# Altium PCB firing_angle_control.PcbDoc
Units mm, origin at the board's own origin, x right, y up, seen from the top; angles counter-clockwise.
Board outline 70 x 70 mm, 2 copper layers (Top Layer, Bottom Layer); 25 components, 19 nets, 82 pads, 4 vias.
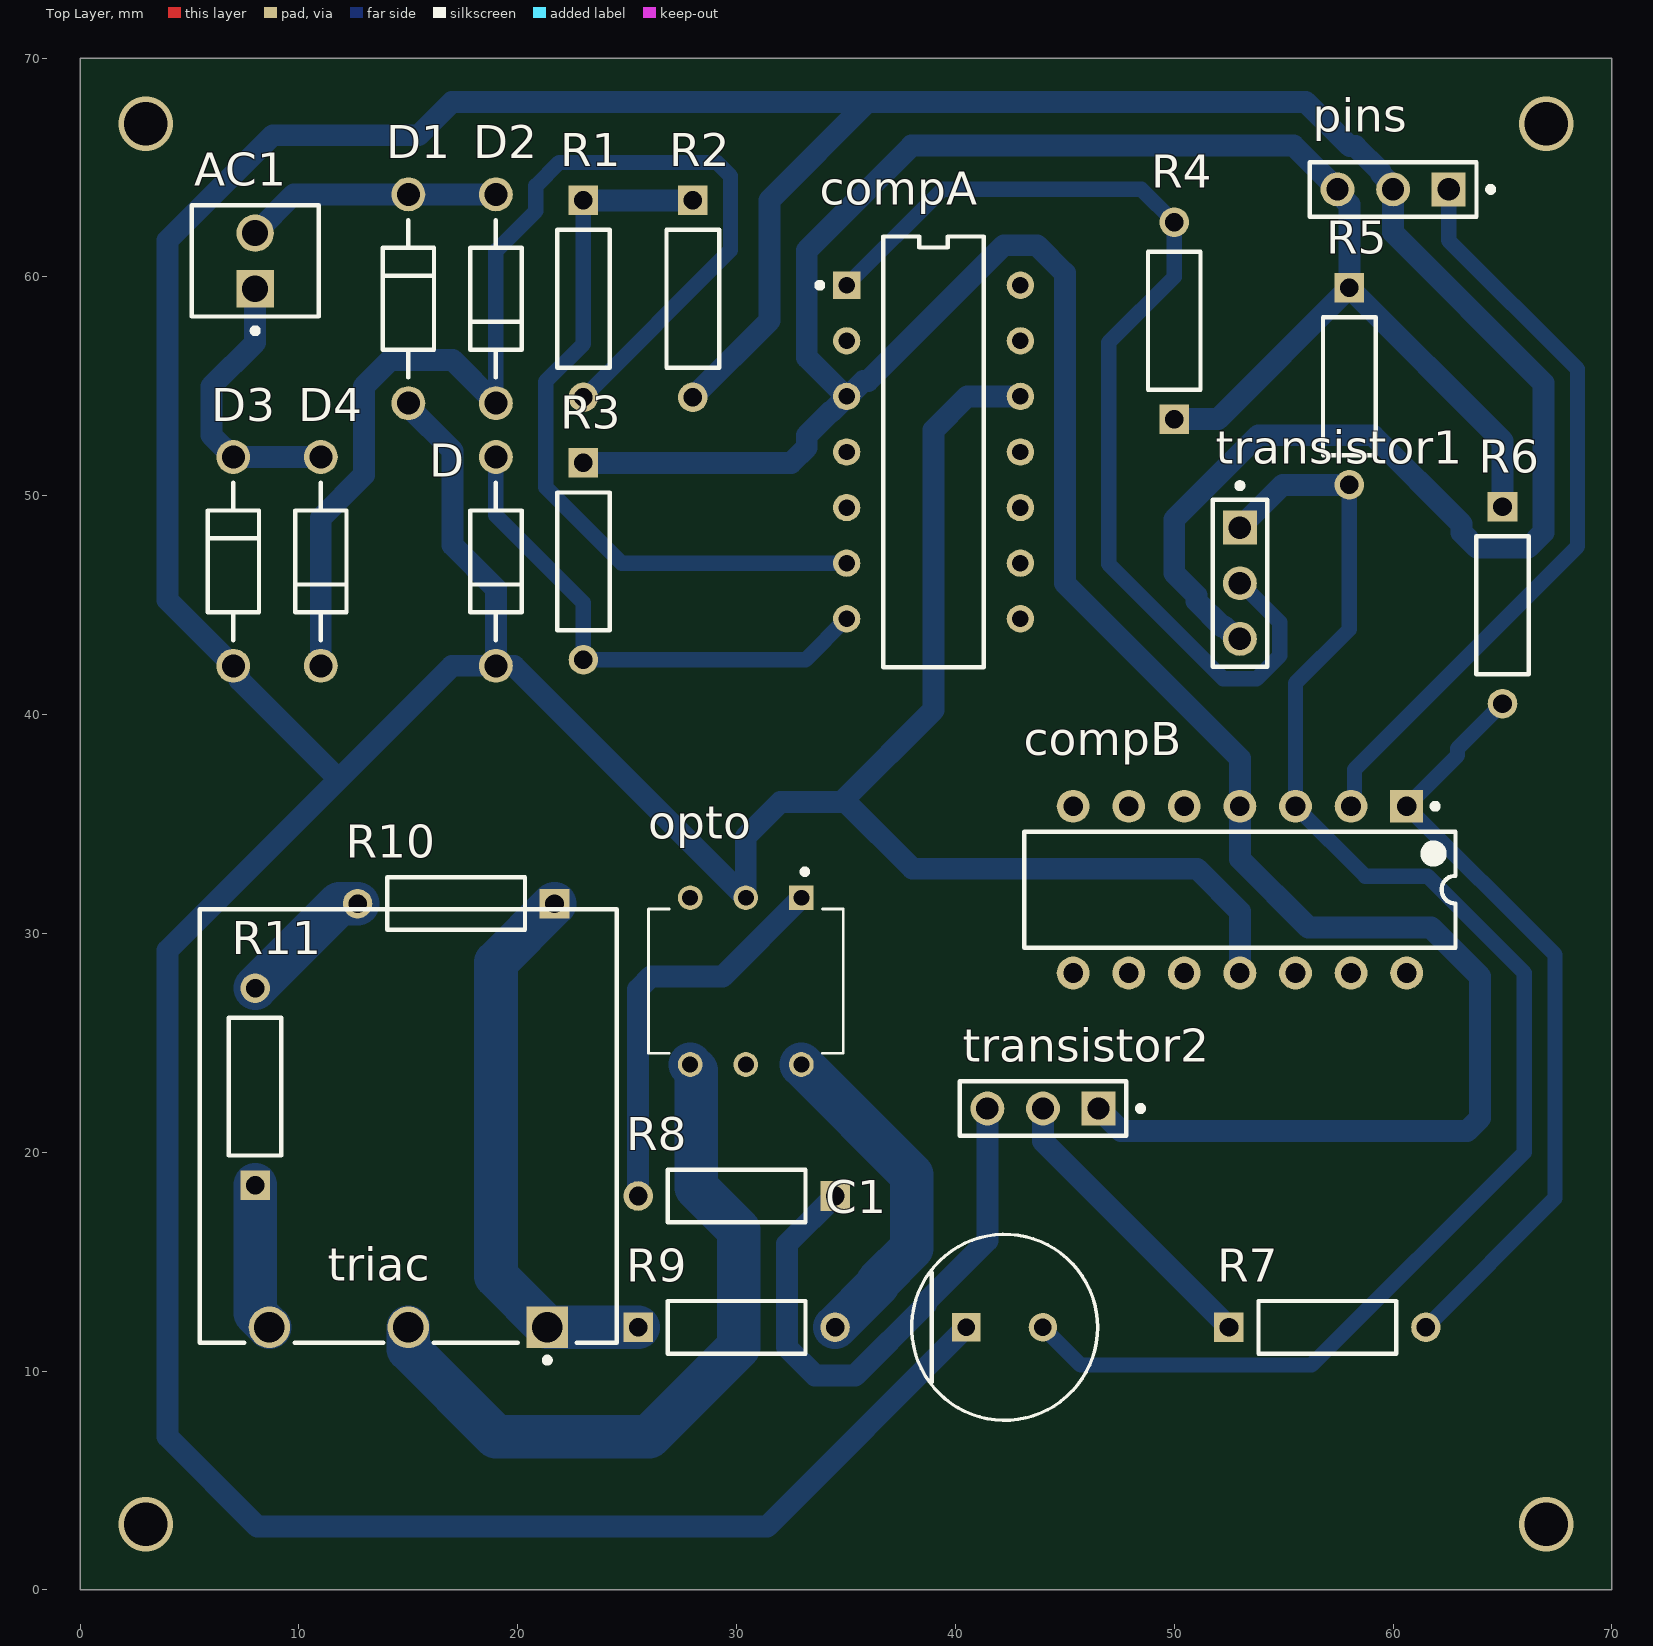
[diagram p0: Top Layer view]
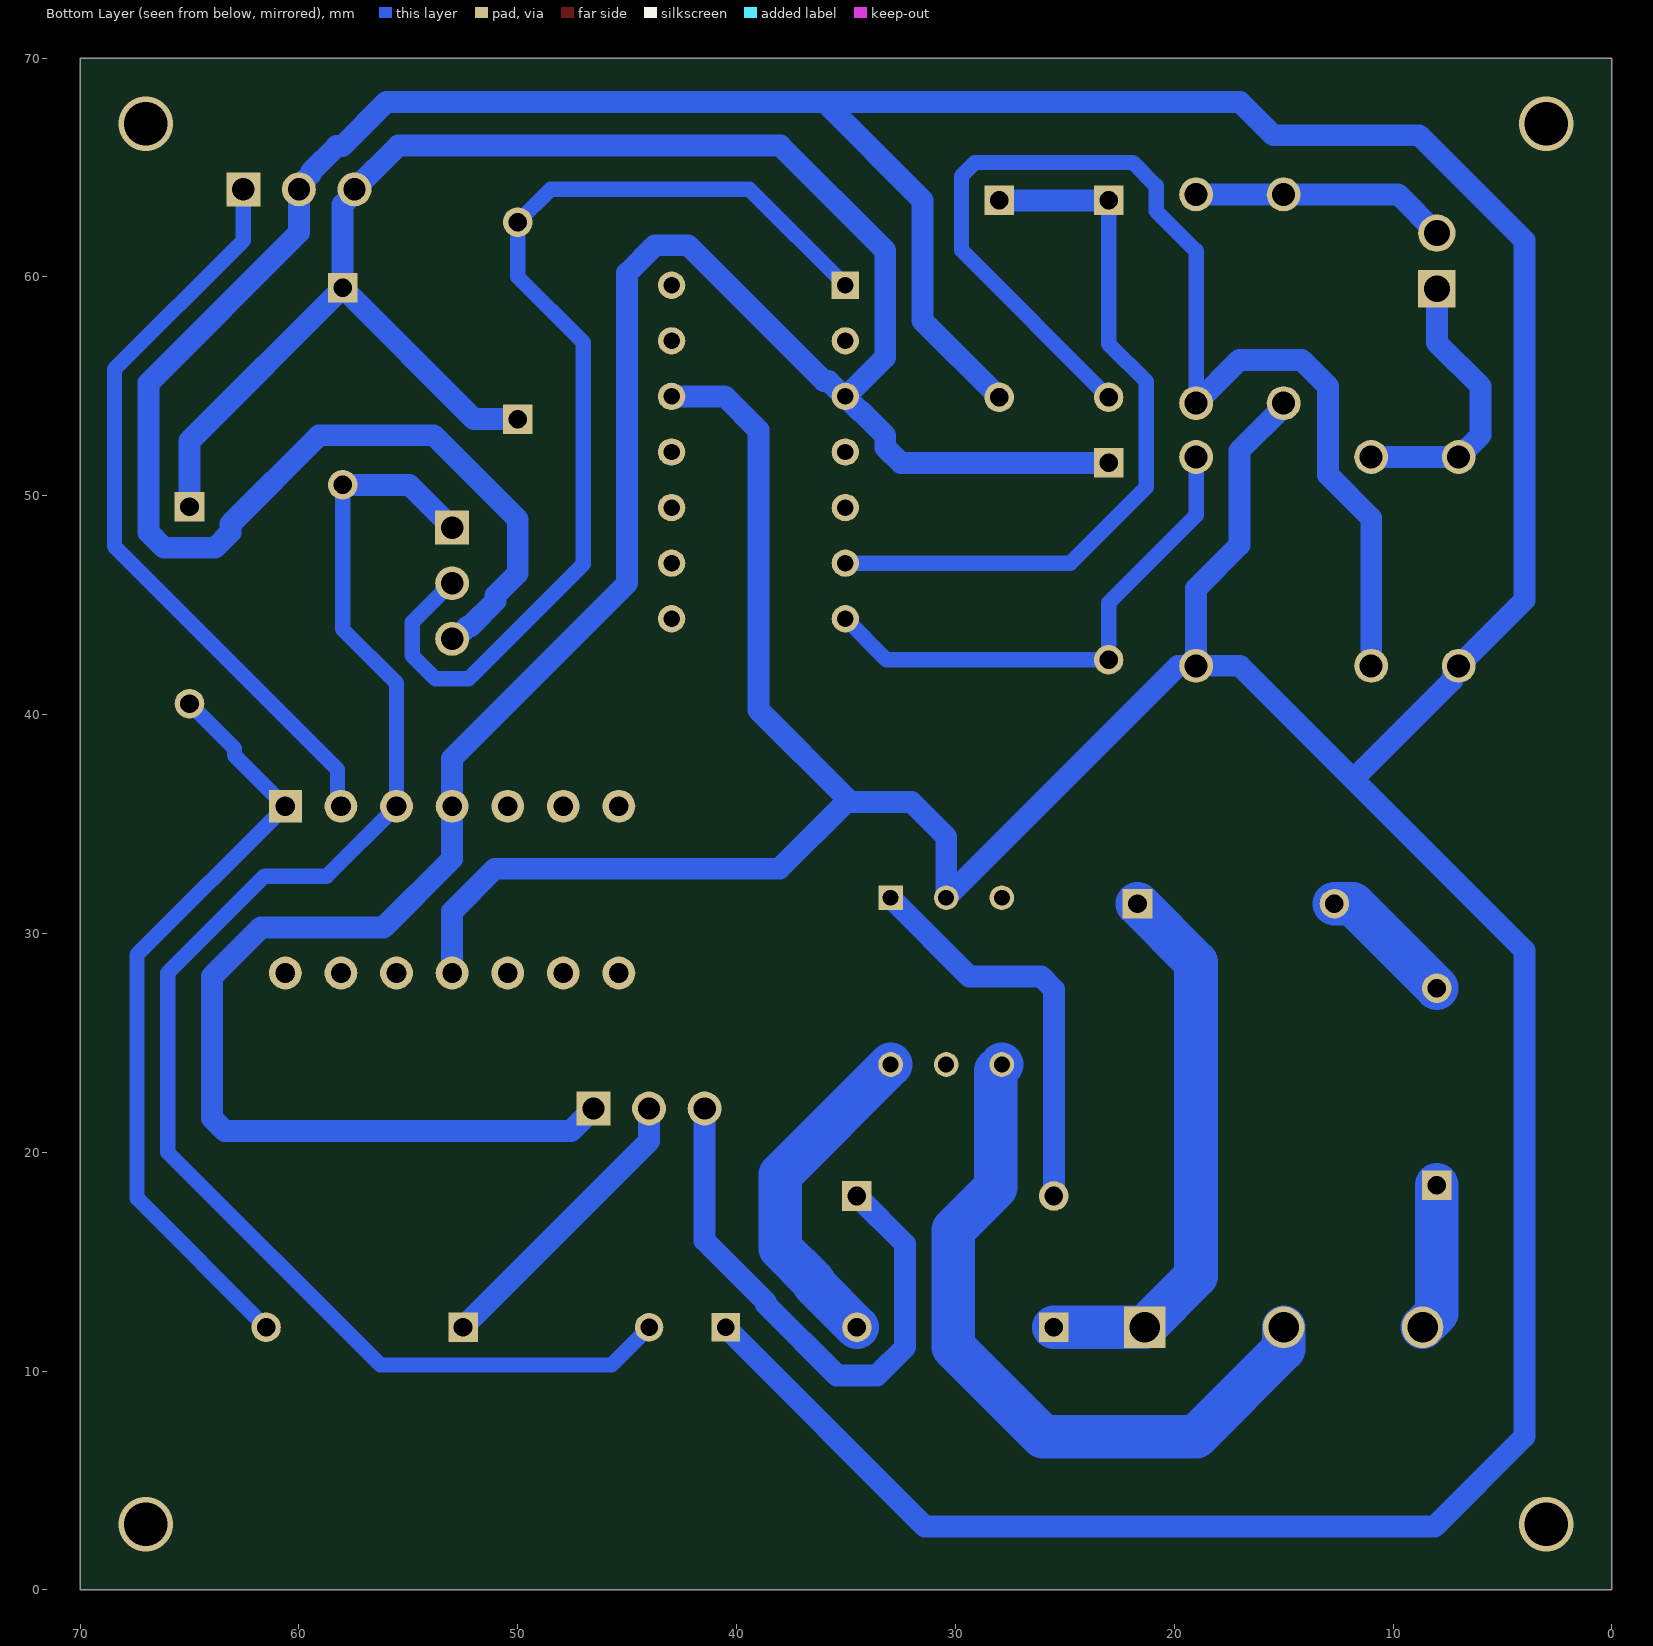
[diagram p1: Bottom Layer view, seen from below]

## Layer stack, top to bottom
Top Solder: solder mask 0.0102, Solder Resist, Dk 3.5
Top Layer: signal copper 0.0356
Dielectric 1: dielectric 0.32, FR-4, Dk 4.8
Bottom Layer: signal copper 0.0356
Bottom Solder: solder mask 0.0102, Solder Resist, Dk 3.5

## Board outline
0,0 70,0 70,70 0,70

## Design rules (kind name [scope] priority, off if disabled: settings)
Clearance [All] p1: gap=0.7 ignorepadtopadclearanceinfootprint=FALSE
PolygonConnect [All] p1: connectstyle=Relief reliefconductorwidth=0.254 reliefentries=4 polygonreliefangle="90 Angle" airgapwidth=0.254
RoutingLayers [All] p1: top layer_v5=FALSE bottom layer_v5=TRUE
RoutingVias [All] p1: holewidth=0.75 width=1 viastyle="Through Hole" minholewidth=0.75 minwidth=1 maxholewidth=0.75 maxwidth=1
SolderMaskExpansion [All] p1: expansion=0.102 istentingtop=FALSE
Width [All] p1: maxlimit=2 minlimit=0.7 preferedwidth=1
29 further rules are at their usual default settings.

## Components (designator, comment, footprint, x,y, rotation, side; value= is the part's Value field where it differs from the comment)
AC1 "22-27-2021" MOLX-22-27-2021_V 8,60.73 r90 top
C1 "EEUHD1E221" FP-RAD-TH-D_8_0_5-L_11_5-MFG 42.25,12 r0 top
compA "LM339N" FP-N0014A-MFG 39,52 r0 top
compB "LM324N" N0014A 53,32 r270 top
D "1N4007" ONSC-AXIAL_LEAD-2-59-10_P 19,47 r90 top
D1 "1N4007" ONSC-AXIAL_LEAD-2-59-10_P 15,59 r270 top
D2 "1N4007" ONSC-AXIAL_LEAD-2-59-10_P 19,59 r90 top
D3 "1N4007" ONSC-AXIAL_LEAD-2-59-10_P 7,47 r270 top
D4 "1N4007" ONSC-AXIAL_LEAD-2-59-10_P 11,47 r90 top
opto "MOC3021" DIP762W45P254L889H508Q6 30.42,27.82 r270 top
pins "22-28-4033" MOLX-22-28-4033_V 60,64 r180 top
R1 "330" RESA60-630X240 23,59 r270 top
R2 "1k" RESA60-630X240 28,59 r270 top
R3 "1k" RESA60-630X240 23,47 r270 top
R4 "1k" RESA60-630X240 50,58 r90 top
R5 "3k" RESA60-630X240 58,55 r270 top
R6 "1k" RESA60-630X240 65,45 r270 top
R7 "1k" RESA60-630X240 57,12 r0 top
R8 "1k" RESA60-630X240 30,18 r180 top
R9 "1k" RESA60-630X240 30,12 r0 top
R10 "10k" RESA60-630X240 17.18,31.36 r180 top
R11 "10k" RESA60-630X240 8,23 r90 top
transistor1 "22-28-4033" MOLX-22-28-4033_V 53,46 r270 top
transistor2 "22-28-4033" MOLX-22-28-4033_V 44,22 r180 top
triac "3852A-282-103AL" BOUR-3852A-282-103AL-3_V 15,12 r180 top

## Footprints (in the part's own frame and the unit in brackets; to place one, negate y for a bottom-side part, rotate by r counter-clockwise, add the part's x,y. Pads: shape width x height; smd on the part's side, far side on the other; paste and mask are expansions set on the pad)
BOUR-3852A-282-103AL-3_V [mm] "TH, 3-Leads, Body 19.81x19.05mm, Pitch 6.35mm"
  rect 1.9x1.9 hole 1.4: 1(-6.35,0)
  round 1.9 hole 1.4: 2(0,0) 3(6.35,0)
  silkscreen extent -9.53,-19.11 9.53,1.62, body extent -9.52,-19.11 9.52,0.7, height 19.05
DIP762W45P254L889H508Q6 [mm]
  rect 1.13x1.13 hole 0.73: 1(-3.81,2.54)
  round 1.13 hole 0.73: 2(-3.81,0) 3(-3.81,-2.54) 4(3.81,-2.54) 5(3.81,0) 6(3.81,2.54)
  silkscreen extent -5.12,-4.45 3.3,4.45
FP-N0014A-MFG [mm]
  rect 1.25x1.25 hole 0.75 paste-1000 mask+0: 1(-3.97,7.62)
  round 1.25 hole 0.75 paste-1000 mask+0: 2(-3.97,5.08) 3(-3.97,2.54) 4(-3.97,0) 5(-3.97,-2.54) 6(-3.97,-5.08) 7(-3.97,-7.62) 8(3.97,-7.62) 9(3.97,-5.08) 10(3.97,-2.54) 11(3.97,0) 12(3.97,2.54) 13(3.97,5.08) 14(3.97,7.62)
  silkscreen extent -5.32,-9.85 2.3,9.84, body extent -4.69,-9.94 4.69,9.94, height 0.25
FP-RAD-TH-D_8_0_5-L_11_5-MFG [mm]
  rect 1.3x1.3 hole 0.8 paste-1000 mask+0: 1(-1.75,0)
  round 1.3 hole 0.8 paste-1000 mask+0: 2(1.75,0)
  silkscreen extent -4.25,-4.25 4.25,4.25, body extent -4.35,-4.35 4.35,4.35, height 0.25
MOLX-22-27-2021_V [mm] "Header, 2-Leads, Body 5.8x5.08mm"
  rect 1.7x1.7 hole 1.19: 1(-1.27,0)
  round 1.7 hole 1.19: 2(1.27,0)
  silkscreen extent -3.31,-2.9 2.54,2.9, body extent -2.54,-2.9 2.54,2.9, height 11.72
MOLX-22-28-4033_V [mm] "THD, 3-Leads, Body 7.62x2.49mm, Pitch 2.54mm"
  rect 1.55x1.55 hole 1.02: 1(-2.54,0)
  round 1.55 hole 1.02: 2(0,0) 3(2.54,0)
  silkscreen extent -4.59,-1.25 3.81,1.24, body extent -3.81,-1.24 3.81,1.24, height 8.38
N0014A [mm] "DIP, 14-Leads, Body 19.7x6.6mm, Pitch 2.54mm"
  rect 1.5x1.5 hole 0.9: 1(-3.81,7.62)
  round 1.5 hole 0.9: 2(-3.81,5.08) 3(-3.81,2.54) 4(-3.81,0) 5(-3.81,-2.54) 6(-3.81,-5.08) 7(-3.81,-7.62) 8(3.81,-7.62) 9(3.81,-5.08) 10(3.81,-2.54) 11(3.81,0) 12(3.81,2.54) 13(3.81,5.08) 14(3.81,7.62)
  silkscreen extent -3.93,-9.85 2.65,9.85, body extent -3.95,-9.85 3.95,9.85, height 5.08
ONSC-AXIAL_LEAD-2-59-10_P [mm] "AXIAL, 2-Leads, Diameter 2.35mm"
  round 1.55 hole 1.05: 1(-4.77,0) 2(4.77,0)
  silkscreen extent -3.6,-1.18 3.6,1.17
RESA60-630X240 [mm] "Axial Resistor, 2-Leads, Dia 2.4mm, Body Length 6.3mm"
  rect 1.35x1.35 hole 0.85: 1(-4.5,0)
  round 1.35 hole 0.85: 2(4.5,0)
  silkscreen extent -3.15,-1.2 3.15,1.2, body extent -3.15,-1.2 3.15,1.2, height 2.4

## Part data
AC1: library part CMP-2000-05537-1, "Male Header, Pitch 2.54 mm, 1 x 2 Position, Height 11.7 mm, Tail Length 3.56 mm, 0 to 75 degC, RoHS, Bulk", Current - Max=4A, Manufacturer=Molex, Operating temperature=0°Cto+75°C, Package Description="2-Leads Header, Body 5.08 x 5.8 mm, Pitch 2.54 mm", Package Version="Rev. BC, 02/2012", PartNumber=0022272021, Voltage - Max=250V, Contact Material=Tinplatedbrass, Current Rating=4A, Datasheet URL=http://www.molex.com/pdm_docs/sd/022272021_sd.pdf, Datasheet Version="Rev. F, 06/2009", Housing Material=Nylon(UL94V-0), Manufacturer URL=http://www.molex.com/, Mounting Technology=ThroughHole, No. of Positions=2, No. of Rows=1, Orientation=Vertical, Package Reference=22-27-2021, Pitch=2.54mm, Voltage Rating=250V
C1: library part CMP-05427-001200-1, "Aluminum Electrolytic Capacitors (Radial Lead Type) AEC-Q200 Qualified 220uF ±20% 25V", Capacitance=220uF, Case/Package=Radial, Max Operating Temperature=105°C, Min Operating Temperature=-55°C, Package Quantity=200, Ripple Current=230mA, Tolerance=20%, Voltage=25V, Construction=RADIAL, Contact Plating=Tin, Diameter=8mm, Height=11.5mm, Height - Seated (Max)=0.512inch, Lead Diameter=0.6mm, Lead Pitch=3.5mm, Lead/Base Style=Straight, Length=11.5mm, Life (Hours)=1000Hour, Mount="Through Hole", Number of Pins=2, Packaging=Bulk, Polarity=Polar, REACH SVHC="No SVHC", Ripple Current (AC)=230mA, RoHS Compliant=Yes, Series=HD, Termination=Radial, Voltage Rating=25V, Voltage Rating (DC)=25V
compA: library part CMP-0055-00143-4, "IC QUAD DIFF COMPARATOR 14-DIP", Case/Package=PDIP, Dual Supply Voltage=9V, Input Bias Current=250nA, Input Offset Voltage (Vos)=5mV, Max Dual Supply Voltage=15V, Max Operating Temperature=70°C, Max Power Dissipation=1.05W, Max Supply Current=500uA, Max Supply Voltage=30V, Min Dual Supply Voltage=1V, Min Operating Temperature=0°C, Min Supply Voltage=2V, Nominal Supply Current=2mA, Output Current=20mA, Output Current per Channel=6mA, Package Quantity=25, Power Dissipation=1.05kW, Quiescent Current=2.5mA, Voltage Gain=106.02dB, Contact Plating=Gold, Height=4.57mm, Lead Free="Lead Free", Length=19.3mm, Max Input Current=250nA, Mount="Through Hole", Number of Channels=4, Number of Elements=4, Number of Pins=14, Output Type=TTL, Packaging=Rail/Tube, Radiation Hardening=No, REACH SVHC="No SVHC", Response Time=1.3us, Weight=0.032734oz, Width=6.35mm
compB: library part CMP-0055-00082-3, "Low Power Quad Operational Amplifier, 14-pin MDIP", Manufacturer="Texas Instruments", Package Reference=N0014A, PackageTopMarking=NSUZXYYTTE#*LM324N, PowerWise=N, Code_JEDEC=MS-001-AA, ComponentLink1Description="Datasheet URL", ComponentLink1URL=http://www.ti.com/general/docs/lit/getliterature.tsp?genericPartNumber=LM324&fileType=pdf, CompType=Amplifiers, PackageDescription="MDIP, .750 x .250 x.130in, 14 Lead, .100in Pitch", PinCount=14, RoHS=N
D D1 D2 D3 D4: library part CMP-0902-00142-1, "Standard Recovery Rectifier, 2-Pin Axial_Lead, Pb-Free, Bulk Bag", Manufacturer="On Semiconductor", ComponentLink1Description="Manufacturer URL", ComponentLink1URL=http://www.onsemi.com/, ComponentLink2Description=Datasheet, ComponentLink2URL=http://www.onsemi.com/pub_link/Collateral/1N4001-D.PDF, ComponentLink3Description="Package Specification", ComponentLink3URL=http://www.onsemi.cn/pub_link/Collateral/59-10.PDF, DatasheetVersion="Rev. 13", IFSM Max (A)=30, IO(rec) Max (A)=1, Mounting Technology="Through Hole", PackageDescription="2-Pin, Axial Lead, Diameter 2.35 mm", PackageReference=AXIAL_LEAD-2-59-10, PackageVersion="Rev. U, 02/2005", Packing="Bulk Bag", PartNumber=1N4007, RoHS=TRUE, Type="Standard Recovery", VRRM Max (V)=1000
opto: "Optoisolator Triac Output 5000Vrms 1 Channel 6-DIP", Package="DIP-6 Lite-On", Availability=Unavailable, MF=Lite-On, MP=MOC3021, Price=None, SnapEDA_Link=https://www.snapeda.com/parts/MOC3021/Lite-On/view-part/4551083/?ref=snap
pins transistor1 transistor2: library part CMP-1676-00001-5, "Male Header, Pitch 2.54 mm, 1 x 3 Position, Height 8.38 mm, Tail Length 3.18 mm, RoHS, Bulk", Colour=Black, Current Rating="4 A", Manufacturer=Molex, Max Operating Temperature="75 degC", Min Operating Temperature="0 degC", Package Quantity=1, Voltage Rating="250 V", ComponentLink1Description="Manufacturer URL", ComponentLink1URL=http://www.molex.com/, ComponentLink2Description=Datasheet, ComponentLink2URL=http://www.molex.com/pdm_docs/sd/022284033_sd.pdf, Contact Finish=Gold, Contact Material=Brass, Contact Plating=Gold, DatasheetVersion="Rev. G, 01/2012", Height="8.38 mm", Lead Pitch="0.1 inch", Length="7.62 mm", Mount="Through Hole", Mounting Technology="Through Hole", PackageDescription="Male Header, Pitch 2.54 mm, 1 x 3 Position, Height 8.38 mm, Tail Length 3.18 mm", PackageReference=22-28-4033, Packaging=Bulk, Pins=3, REACH SVHC=Unknown, RoHSCompliant=true, Rows=1
R1 R2 R3 R4 R5 R6 R7 R8 R9 R10 R11: library part CMP-1659-00075-1, "Axial Resistor, 1 KOhm, +/- 1%, 250 mW, -55 to 155 degC, 2-Pin THD, RoHS, Bulk", Case\Package=Axial, Max Operating Temperature="155 degC", Min Operating Temperature="-55 degC", Package Quantity=200, Power Rating="250 mW", Resistance="10 kohm", Tolerance=1%, Voltage Rating="250 V", ComponentLink1Description="Manufacturer URL", ComponentLink1URL=http://www.yageo.com/, ComponentLink2Description=Datasheet, ComponentLink2URL=http://www.yageo.com/documents/recent/Yageo%20LR_MFR_2013.pdf, DatasheetVersion=Apr-13, Length="0.248 inch", PackageDescription="2-Pin Axial Lead, Dia 2.4 mm, Body Length 6.3 mm", PackageReference=MFR-25, Packaging=Bulk, RoHSCompliant=true
triac: library part CMP-2000-05079-1, "Diameter Panel Control, 10 KOhm, +/- 10%, 2 W, -1 to 125 degC, 3-Pin THD, RoHS, Bulk", Manufacturer=Bourns, Power (Watts)=2W, Resistance (Ohms)=10k, Resistive Material=Cermet, Standard Package=45, Temperature Coefficient=±150ppm/degC, Tolerance=±10%, Actuator Diameter="0.250\"(6.35mm)", Actuator Length="0.875\"(22.23mm)", Actuator Type=Slotted, Associated Product="36-8560-ND / -KNOBINSTRUMW/DIALRND.9\"DIA / 36-8555-ND / -KNOBINSTRUMSKIRTEDRND.7\"DIA / 36-8556-ND / -KNOBINSTRUMSKIRTEDRND.9\"DIA / 36-8565-ND / -KNOBINSTRUMDBLBARRND.7\"DIA / 36-8566-ND / -KNOBINSTRUMDBLBARRND.9\"DIA / 36-8568-ND / -KNOBINSTRUMSGLBARRND.7\"DIA / 36-8569-ND / -KNOBINSTRUMSGLBARRND.9\"DIA / 36-8559-ND / -KNOBINSTRUMW/DIALRND.7\"DIA / 226-1006-ND / -KNOBBLKGLOSS.75\"DIA.250\"SHAFT / 226-1007-ND / -KNOBBLKGLOSS.925\"DIA.250\"SHAFT / 226-1011-ND / -KNOBBLKGLOS", Built in Switch=None, Bushing Thread=3/8-32, Catalog Drawings="3852SeriesSide1 /  / 3852SeriesSide2", Category=Potentiometers,VariableResistors, Datasheet URL=https://datasheet.ciiva.com/11831/0900766b80f93b4b-11831016.pdf, Datasheet Version=Sep-14, Family=RotaryPotentiometers,Rheostats, Manufacturer URL=http://www.bourns.com/, Mounting Type=PanelMount, Number of Gangs=1, Number of Turns=1, Online Catalog=3852and3856Series, Other Names=3852A282103AL, Packaging=Bulk, PCN Design/Specification=PBTResinJun/2011, PCN Other=MultipleChanges01/Dec/2012, RoHS Information=3852A-LMaterialDeclaration, Rotation=280deg, Series=3852, Taper=Linear, Termination Style=SolderLug

## Via types
v1: diameter 2.5, hole 2, Top Layer to Bottom Layer, 4 vias

## Nets (pads, with @x,y where several pads share a name; then routed paths per layer and width w, separated by ;. In a path a pad name is that pad's centre, name@x,y a point inside that pad or via, vN(x,y) a via of type N, cw(c..) or ccw(c..) an arc to the next point about the centre after c; other vN are vias at no path point)
12V: compA.3 compB.4 pins.3 R3.1 R4.1 R5.1 R6.1 transistor2.1 | length 157.4
  Bottom Layer w1: R3.1 32.5,51.5 33.205,52.205 33.205,52.756 34.274,53.825 34.319,53.825 35.03,54.536 compA.3 ; transistor2.1 47.569,20.971 63.385,20.971 63.971,21.557 63.971,28.029 61.732,30.268 56.136,30.268 53,33.404 53,38 45,46 45,60.171 43.726,61.445 42.214,61.445 36.016,55.247 35.805,55.247 35.098,54.54 compA.3 ; R4.1 52,53.5 R5.1 ; R6.1 65,52.5 R5.1 ; compA.3 34.989,54.54 33.205,56.324 33.205,61.205 38,66 55.46,66 pins.3 57.46,63.851 58,63.311 R5.1
GND: C1.1 compA.12 compB.11 D1.2 D3.2 D.1 opto.2 pins.2 R2.2 transistor1.3 | length 319.7
  Bottom Layer w1: D1.2 15,54.081 17.025,52.056 17.025,47.738 19,45.763 D.1 ; R2.2@28.067,54.567 31.505,58.005 31.505,63.505 36,68 ; 34.895,36.105 39,40.21 39,53 40.54,54.54 compA.12 ; C1.1 31.398,2.898 8.102,2.898 4,7 4,29.23 11.815,37.045 ; compB.11 53,31 51.047,32.953 38.047,32.953 35,36 32,36 30.42,34.42 opto.2 19.82,42.23 D.1 ; transistor1.3 52.851,43.46 52.286,44.025 52.182,44.025 51.025,45.182 51.025,45.435 50,46.46 50,48.921 53.842,52.763 59.074,52.763 63.125,48.712 63.125,48.328 63.828,47.625 66.172,47.625 66.875,48.328 66.875,55.147 60,62.022 pins.2 60,64.149 59.435,64.714 59.435,64.818 58.278,65.975 58.025,65.975 56,68 36,68 ; 11.815,37.045 7.275,41.586 7.275,41.806 7,42.081 D3.2 4,45.23 4,61.671 8.804,66.475 15.474,66.475 16.999,68 36,68 ; 11.815,37.045 17,42.23 D.1
NetAC1_1: AC1.1 D3.1 D4.2 | length 12.9
  Bottom Layer w1: AC1.1 8,57 6,55 6,52.77 D3.1 D4.2
NetAC1_2: AC1.2 D1.1 D2.2 | length 11.7
  Bottom Layer w1: AC1.2 9.77,63.77 D1.1 D2.2
NetC1_2: C1.2 compB.3 R5.2 transistor1.1 | length 70.1
  Bottom Layer w0.7: C1.2 45.725,10.275 56.275,10.275 66,20 66,28.192 61.576,32.616 58.729,32.616 55.54,35.804 compB.3 55.54,41.439 58,43.899 R5.2
  Bottom Layer w1: transistor1.1 54.96,50.5 R5.2
NetcompA_1: compA.1 R4.2 transistor1.2 | length 48.8
  Bottom Layer w0.7: compA.1 39.41,64 48.5,64 R4.2 50,60 47,57 47,46.879 52.244,41.635 53.756,41.635 54.825,42.704 54.825,44.216 53.041,46 transistor1.2
NetcompA_6: compA.6 R1.1 R2.1 | length 34
  Bottom Layer w0.7: R1.1 23,56.94 21.275,55.215 21.275,50.39 24.745,46.92 compA.6
  Bottom Layer w1: R1.1 R2.1
NetcompA_7: compA.7 D.2 R3.2 | length 23.7
  Bottom Layer w0.7: D.2 19,49.108 23,45.108 R3.2 33.15,42.5 compA.7
NetcompB_1: compB.1 R6.2 R7.2 | length 35.6
  Bottom Layer w0.7: R7.2 67.4,17.9 67.4,29.03 compB.1 62.948,38.138 62.948,38.448 R6.2
NetcompB_2: compB.2 pins.1 | length 34.9
  Bottom Layer w0.7: compB.2 58.233,35.963 58.233,37.494 68.425,47.686 68.425,55.789 62.54,61.674 pins.1
NetD2_1: D2.1 D4.1 R1.2 | length 54.1
  Bottom Layer w0.7: D2.1 19,61.189 20.825,63.014 20.825,64.16 21.89,65.225 29.11,65.225 29.725,64.61 29.725,61.225 R1.2
  Bottom Layer w1: D4.1 11,48.977 12.975,50.952 12.975,54.998 14.182,56.205 17.025,56.205 D2.1
Netopto_1: opto.1 R8.2 | length 18.6
  Bottom Layer w1: R8.2 25.5,27.447 26.086,28.033 29.363,28.033 opto.1
Netopto_4: opto.4 triac.2 | length 33.3
  Bottom Layer w2: triac.2 15,11.01 19.01,7 26,7 30.1,11.1 30.1,16.445 28.155,18.39 28.155,23.735 opto.4
Netopto_6: opto.6 R9.2 | length 15.5
  Bottom Layer w2: opto.6 38,18.97 38,15.608 36.45,14.058 36.45,13.95 R9.2
NetR7_1: R7.1 transistor2.2 | length 13.5
  Bottom Layer w1: transistor2.2 44,20.5 R7.1
NetR8_1: R8.1 transistor2.3 | length 26.2
  Bottom Layer w1: R8.1 32.3,15.8 32.3,11.089 33.589,9.8 35.411,9.8 38.65,13.039 38.65,13.147 41.46,15.957 transistor2.3
NetR9_1: R9.1 R10.1 triac.1 | length 25.6
  Bottom Layer w2: R10.1 19,28.68 19,14.35 triac.1 R9.1
NetR10_2: R10.2 R11.2 | length 6.3
  Bottom Layer w2: R11.2 11.86,31.36 R10.2
NetR11_1: R11.1 triac.3 | length 6.8
  Bottom Layer w2: R11.1 8,12.65 triac.3
pads on no net: compA.2 compA.4 compA.5 compA.8 compA.9 compA.10 compA.11 compA.13 compA.14 compB.5 compB.6 compB.7 compB.8 compB.9 compB.10 compB.12 compB.13 compB.14 opto.3 opto.5
copper on no net:
  other v1: 3,3 67,3 3,67 67,67